# EAGLE board main (EAGLE 9.6.2)

Size 62.23 x 66.67 mm. Coordinates in mm from the lower left corner, seen from the top.
Outline: 0,66.67 62.23,66.67 62.23,0 0,0 0,66.67
Copper layers (1*16): Top 0.035559375mm / dielectric 1.6mm / Bottom 0.035559375mm
Design rules "default *": minimum track width 6mil, minimum drill 10mil, track to track 6mil, track to pad 6mil, pad to pad 6mil, via to via 6mil, smd to smd 6mil, copper to edge 15mil, drill to drill 6mil, minimum pad ring 5mil, minimum via ring 5mil, stop-mask expansion 2.5mil, vias tented up to drill 0mil, thermal gap 10mil

## Footprints (pad centres in the part's own frame; a part is rotated, then mirrored left to right if it is on the bottom)
SMD1,27-2,54 = smd 1.27 x 2.54: 1 0,0
1X02 = drill 1.016 long: 1 -1.27,0; 2 1.27,0
C0805 = smd 1.3 x 1.5: 1 -0.95,0; 2 0.95,0
153CLV-0605 = smd 3.5 x 1.6: + 2.7,0; - -2.7,0
C1210 = smd 1.6 x 2.7: 1 -1.4,0; 2 1.4,0
SOD323-W = smd 1.5 x 1.2: A 1.45,0; C -1.45,0
LED5MM = drill 0.813 octagon: A -1.27,0; K 1.27,0
1X03 = drill 1.016 long: 1 -2.54,0; 2 0,0; 3 2.54,0
INFINEON_IRF8910PBF_0 = smd 1.78 x 0.72: 1 -2.34,1.905; 2 -2.34,0.635; 3 -2.34,-0.635; 4 -2.34,-1.905; 5 2.34,-1.905; 6 2.34,-0.635; 7 2.34,0.635; 8 2.34,1.905
R0805 = smd 1.3 x 1.5: 1 -0.95,0; 2 0.95,0
SOIC127P600X175-14N = smd 1.95 x 0.59: 1 -2.48,3.81; 2 -2.48,2.54; 3 -2.48,1.27; 4 -2.48,0; 5 -2.48,-1.27; 6 -2.48,-2.54; 7 -2.48,-3.81; 8 2.48,-3.81; 9 2.48,-2.54; 10 2.48,-1.27; 11 2.48,0; 12 2.48,1.27; 13 2.48,2.54; 14 2.48,3.81
SOT95P285X140-5N = smd 1.35 x 0.6: 1 -1.185,0.95; 2 -1.185,0; 3 -1.185,-0.95; 4 1.185,-0.95; 5 1.185,0.95
SO-8 = smd 1.524 x 0.61: 1 -2.743,1.905; 2 -2.743,0.635; 3 -2.743,-0.635; 4 -2.743,-1.905; 5 2.743,-1.905; 6 2.743,-0.635; 7 2.743,0.635; 8 2.743,1.905
SOT143 = smd 1.2 x 1.44: 1 -0.75,-1.1 | smd 1 x 1.44: 2 0.95,-1.1; 3 0.95,1.1; 4 -0.95,1.1

## Placement (x,y rotation side)
3V3_PAD  [SMD1,27-2,54]  -14.6,-59.69 0 top  (outside the outline)
BAT  [1X02]  -10.16,-44.45 0 top  (outside the outline)
BAT_EN_PAD  [SMD1,27-2,54]  -29.84,-59.69 0 top  (outside the outline)
BEOFRE_V  [SMD1,27-2,54]  -18.41,-59.69 0 top  (outside the outline)
C1  1nf  [C0805]  48.89,40.64 0 top
C2  1nf  [C0805]  49.53,33.02 0 top
C3  1nf  [C0805]  10.8,-1.91 0 top
C4  100uf  [153CLV-0605]  3.81,-10.8 0 top  (outside the outline)
C5  1uf  [C1210]  33.66,53.98 0 top
C6  1uf  [C1210]  57.78,63.5 0 top
C7  1uf  [C1210]  57.78,57.78 0 top
D1  [SOD323-W]  10.8,14.6 0 top
D2  [SOD323-W]  10.8,10.16 0 top
LED1  [LED5MM]  12.07,-6.35 0 top  (outside the outline)
LED2  [LED5MM]  12.07,-13.34 0 top  (outside the outline)
OUT  [1X02]  -10.16,-50.16 0 top  (outside the outline)
PROGRAM  [1X03]  -8.89,-55.88 0 top  (outside the outline)
Q1  j  [INFINEON_IRF8910PBF_0]  36.83,40.64 0 top
R1  200k  [R0805]  57.15,52.7 0 top
R2  100k  [R0805]  57.15,48.26 0 top
R3  200k  [R0805]  57.15,43.81 0 top
R4  100k  [R0805]  57.15,39.37 0 top
R5  65  [R0805]  1.91,-20.32 0 top  (outside the outline)
R6  65  [R0805]  1.91,-24.77 0 top  (outside the outline)
R7  100k  [R0805]  -7.62,-29.21 0 top  (outside the outline)
R8  1k  [R0805]  -7.62,-33.66 0 top  (outside the outline)
SERIAL  [1X02]  -36.83,-67.31 0 top  (outside the outline)
U1  ATTINY1614-SSNR  [SOIC127P600X175-14N]  48.26,23.49 0 top
U2  RS3236-3.3  [SOT95P285X140-5N]  26.67,43.81 0 top
U$1  IRF7314PBF  [SO-8]  12.07,30.48 0 top
U$2  MIC5018  [SOT143]  11.43,21.59 0 top
U$3  MIC5018  [SOT143]  11.43,5.08 0 top
UPDI_PAD  [SMD1,27-2,54]  -22.23,-59.69 0 top  (outside the outline)
V_OUT_PAD  [SMD1,27-2,54]  -41.28,-66.04 0 top  (outside the outline)
VB_SENSE_PAD  [SMD1,27-2,54]  -37.47,-59.69 0 top  (outside the outline)
WALL  [1X02]  -10.16,-38.73 0 top  (outside the outline)
WALL_EN_PAD  [SMD1,27-2,54]  -26.03,-59.69 0 top  (outside the outline)
WALL_SENSE_PAD  [SMD1,27-2,54]  -33.66,-59.69 0 top  (outside the outline)

## Library data of the parts
3V3_PAD BAT_EN_PAD BEOFRE_V UPDI_PAD V_OUT_PAD VB_SENSE_PAD WALL_EN_PAD WALL_SENSE_PAD = wirepad
BAT OUT PROGRAM SERIAL WALL = pinhead
C1-C7 = rcl; SPICEPREFIX: C
D1 D2 = diode
LED1 LED2 = led
Q1 = Infineon - IRF8910PBF; AUTOMOTIVE: No; CENTROID_NOT_SPECIFIED: No; CONTINUOUS_DRAIN_CURRENT: 10A; DATASHEET: https://www.infineon.com/dgdl/irf8910pbf.pdf?fileId=5546d462533600a401535610ec101d8d; DEPLETION_MODE: False; DEVICE_CLASS_L1: Discrete Semiconductors; DEVICE_CLASS_L2: Transistors; DEVICE_CLASS_L3: MOSFETs; DIGIKEY_DESCRIPTION: MOSFET 2N-CH 20V 10A 8-SOIC; DIGIKEY_PART_NUMBER: IRF8910PBF-ND; DRAIN_TO_SOURCE_BREAKDOWN_VOLTAGE: 20V; DRAIN_TO_SOURCE_RESISTANCE: 14.6mΩ; DRAIN_TO_SOURCE_VOLTAGE: 20V; FOOTPRINT_PARAMETERS_1: {"fp_type":"SOIC_narrow","params":{"N":{"nom":"8","long name":"Number of leads","min":null,"max":null,"short name":"N","type":"count"},"A":{"nom":false,"long name":"Height","min":1350000,"max":1750000,"short name":"A","type":"measurement"},"A1":{"nom":false,"long name":"Package clearance","min":100000,"max":250000,"short name":"A1","type":"measurement"},"A2":{"nom":false,"long name":"Package height","min":false,"max":1500000,"short name":"A2","type":"measurement"},"D":{"nom":false,"long name":"Package length","min":4800000,"max":5000000,"short name":"D","type":"measurement"},"E":{"nom":false,"long name":"Width w/ leads","min":5800000,"max":6200000,"short name":"E","type":"measurement"},"E1":{"nom":false,"long name":"Package width","min":3800000,"max":4000000,"short name":"E1","type":"measurement"},"B":{"nom":false,"long name":"Lead width","min":330000,"max":510000,"short name":"B","type":"measurement"},"C":{"nom":false,"long name":"Lead thickness","min":190000,"max":250000,"short name":"C","type":"measurement"},"e":{"nom":1270000,"long name":"Lead pitch","min":null,"max":null,"short name":"e","type":"measurement"},"L":{"nom":false,"long name":"Lead foot length","min":400000,"max":1270000,"short name":"L","type":"measurement"},"PHI":{"nom":false,"long name":"Lead foot angle","min":0,"max":8000000,"short name":"PHI","type":"measurement"},"HT":{"default":"No","long name":"Thermal pad","type":"multichoiceparent","short name":"HT","children":[]},"offset x":{"nom":0,"long name":"X Center offset","min":null,"max":null,"short name":"offset x","type":"measurement"},"offset y":{"nom":0,"long name":"Y Center offset","min":null,"max":null,"short name":"offset y","type":"measurement"},"LS":{"default":"Rounded rectangle","long name":"Land shape","type":"multichoice","short name":"LS"},"LS1":{"default":"Rectangle","long name":"Land shape (Pin 1)","type":"multichoice","short name":"LS1"},"solder toe":{"nom":550000,"long name":"Solder fillet (toe)","min":null,"max":null,"short name":"solder toe","type":"fixedmeasurement"},"solder heel":{"nom":450000,"long name":"Solder fillet (heel)","min":null,"max":null,"short name":"solder heel","type":"fixedmeasurement"},"solder side":{"nom":50000,"long name":"Solder fillet (side)","min":null,"max":null,"short name":"solder side","type":"fixedmeasurement"},"courtyard":{"nom":500000,"long name":"Courtyard","min":null,"max":null,"short name":"courtyard","type":"fixedmeasurement"},"SF":{"default":"A","long name":"Packing level","type":"multichoiceparent","short name":"SF","help":"http://support.upverter.com/customer/portal/articles/978783-what-is-a-footprint-packing-level","children":["solder toe","solder heel","solder side","courtyard"]}}}; FOOTPRINT_PARAMETERS_2: {"fp_type":"SOIC_narrow","params":{"N":{"nom":"8","long name":"Number of leads","min":null,"max":null,"short name":"N","type":"count"},"A":{"nom":false,"long name":"Height","min":1350000,"max":1750000,"short name":"A","type":"measurement"},"A1":{"nom":false,"long name":"Package clearance","min":100000,"max":250000,"short name":"A1","type":"measurement"},"A2":{"nom":false,"long name":"Package height","min":false,"max":1500000,"short name":"A2","type":"measurement"},"D":{"nom":false,"long name":"Package length","min":4800000,"max":5000000,"short name":"D","type":"measurement"},"E":{"nom":false,"long name":"Width w/ leads","min":5800000,"max":6200000,"short name":"E","type":"measurement"},"E1":{"nom":false,"long name":"Package width","min":3800000,"max":4000000,"short name":"E1","type":"measurement"},"B":{"nom":false,"long name":"Lead width","min":330000,"max":510000,"short name":"B","type":"measurement"},"C":{"nom":false,"long name":"Lead thickness","min":190000,"max":250000,"short name":"C","type":"measurement"},"e":{"nom":1270000,"long name":"Lead pitch","min":null,"max":null,"short name":"e","type":"measurement"},"L":{"nom":false,"long name":"Lead foot length","min":400000,"max":1270000,"short name":"L","type":"measurement"},"PHI":{"nom":false,"long name":"Lead foot angle","min":0,"max":8000000,"short name":"PHI","type":"measurement"},"HT":{"default":"No","long name":"Thermal pad","type":"multichoiceparent","short name":"HT","children":[]},"offset x":{"nom":0,"long name":"X Center offset","min":null,"max":null,"short name":"offset x","type":"measurement"},"offset y":{"nom":0,"long name":"Y Center offset","min":null,"max":null,"short name":"offset y","type":"measurement"},"LS":{"default":"Rounded rectangle","long name":"Land shape","type":"multichoice","short name":"LS"},"LS1":{"default":"Rectangle","long name":"Land shape (Pin 1)","type":"multichoice","short name":"LS1"},"solder toe":{"nom":350000,"long name":"Solder fillet (toe)","min":null,"max":null,"short name":"solder toe","type":"fixedmeasurement"},"solder heel":{"nom":350000,"long name":"Solder fillet (heel)","min":null,"max":null,"short name":"solder heel","type":"fixedmeasurement"},"solder side":{"nom":30000,"long name":"Solder fillet (side)","min":null,"max":null,"short name":"solder side","type":"fixedmeasurement"},"courtyard":{"nom":250000,"long name":"Courtyard","min":null,"max":null,"short name":"courtyard","type":"fixedmeasurement"},"SF":{"default":"B","long name":"Packing level","type":"multichoiceparent","short name":"SF","help":"http://support.upverter.com/customer/portal/articles/978783-what-is-a-footprint-packing-level","children":["solder toe","solder heel","solder side","courtyard"]}}}; FOOTPRINT_PARAMETERS_3: {"fp_type":"SOIC_narrow","params":{"N":{"nom":"8","long name":"Number of leads","min":null,"max":null,"short name":"N","type":"count"},"A":{"nom":false,"long name":"Height","min":1350000,"max":1750000,"short name":"A","type":"measurement"},"A1":{"nom":false,"long name":"Package clearance","min":100000,"max":250000,"short name":"A1","type":"measurement"},"A2":{"nom":false,"long name":"Package height","min":false,"max":1500000,"short name":"A2","type":"measurement"},"D":{"nom":false,"long name":"Package length","min":4800000,"max":5000000,"short name":"D","type":"measurement"},"E":{"nom":false,"long name":"Width w/ leads","min":5800000,"max":6200000,"short name":"E","type":"measurement"},"E1":{"nom":false,"long name":"Package width","min":3800000,"max":4000000,"short name":"E1","type":"measurement"},"B":{"nom":false,"long name":"Lead width","min":330000,"max":510000,"short name":"B","type":"measurement"},"C":{"nom":false,"long name":"Lead thickness","min":190000,"max":250000,"short name":"C","type":"measurement"},"e":{"nom":1270000,"long name":"Lead pitch","min":null,"max":null,"short name":"e","type":"measurement"},"L":{"nom":false,"long name":"Lead foot length","min":400000,"max":1270000,"short name":"L","type":"measurement"},"PHI":{"nom":false,"long name":"Lead foot angle","min":0,"max":8000000,"short name":"PHI","type":"measurement"},"HT":{"default":"No","long name":"Thermal pad","type":"multichoiceparent","short name":"HT","children":[]},"offset x":{"nom":0,"long name":"X Center offset","min":null,"max":null,"short name":"offset x","type":"measurement"},"offset y":{"nom":0,"long name":"Y Center offset","min":null,"max":null,"short name":"offset y","type":"measurement"},"LS":{"default":"Rounded rectangle","long name":"Land shape","type":"multichoice","short name":"LS"},"LS1":{"default":"Rectangle","long name":"Land shape (Pin 1)","type":"multichoice","short name":"LS1"},"solder toe":{"nom":150000,"long name":"Solder fillet (toe)","min":null,"max":null,"short name":"solder toe","type":"fixedmeasurement"},"solder heel":{"nom":250000,"long name":"Solder fillet (heel)","min":null,"max":null,"short name":"solder heel","type":"fixedmeasurement"},"solder side":{"nom":10000,"long name":"Solder fillet (side)","min":null,"max":null,"short name":"solder side","type":"fixedmeasurement"},"courtyard":{"nom":100000,"long name":"Courtyard","min":null,"max":null,"short name":"courtyard","type":"fixedmeasurement"},"SF":{"default":"C","long name":"Packing level","type":"multichoiceparent","short name":"SF","help":"http://support.upverter.com/customer/portal/articles/978783-what-is-a-footprint-packing-level","children":["solder toe","solder heel","solder side","courtyard"]}}}; FOOTPRINT_URL: https://www.infineon.com/cms/en/product/packages/PG-DSO/PG-DSO-8-902/; FOOTPRINT_VARIANT_NAME_0: Recommended_Land_Pattern; FOOTPRINT_VARIANT_NAME_1: IPC_A; FOOTPRINT_VARIANT_NAME_2: IPC_B; FOOTPRINT_VARIANT_NAME_3: IPC_C; GATE_CHARGE_AT_VGS: 7.4nC @ 4.5V; GATE_TO_SOURCE_VOLTAGE: 20V; HEIGHT: 1.75mm; INPUT_CAPACITACE_AT_VDS: 960pF @ 10V; LEAD_FREE: Yes; MAX_FORWARD_DIODE_VOLTAGE: 1V; MAX_JUNCTION_TEMP: +150°C; MF: Infineon; MFG_PACKAGE_IDENT: PG-DSO-8; MFG_PACKAGE_IDENT_COMPONENT_ID: 8fad051ce0ac8b36; MFG_PACKAGE_IDENT_DATE: 11/2006; MFG_PACKAGE_IDENT_REV: 902; MOUSER_PART_NUMBER: 942-IRF8910TRPBF; MPN: IRF8910PBF; NUMBER_OF_CHANNELS: 2; NUMBER_OF_N_CHANNELS: 2; PACKAGE: SOIC8; POWER_DISSIPATION: 2W; PREFIX: Q; PULSE_DRAIN_CURRENT: 82A; REVERSE_RECOVERY_CHARGE: 6.5nC; REVERSE_RECOVERY_TIME: 17ns; ROHS: Yes; RTHJA_MAX: 62.5°C/W; STANDOFF_HEIGHT: 0.1mm; TEMPERATURE_RANGE_HIGH: +150°C; TEMPERATURE_RANGE_LOW: -55°C; THRESHOLD_VGS_MAX: 2.55V; THRESHOLD_VGS_MIN: 1.65V; TURN_OFF_DELAY_TIME: 9.7ns; TURN_ON_DELAY_TIME: 6.2ns; VERIFICATION_VERSION: 0.0.0.3
R1-R8 = rcl; SPICEPREFIX: R
U1 = CustomParts; AVAILABILITY: In Stock; DESCRIPTION: AVR tinyAVR™ 1, Functional Safety (FuSa) Microcontroller IC 8-Bit 20MHz 16KB (16K x 8) FLASH 14-SOIC; MF: Microchip; MP: ATTINY1614-SSNR; PACKAGE: SO-14 Microchip; PRICE: None; PURCHASE-URL: https://pricing.snapeda.com/search/part/ATTINY1614-SSNR/?ref=eda
U2 = AP2112K-3.3TRG1; AVAILABILITY: In Stock; DESCRIPTION: Linear Voltage Regulator IC Positive Fixed 1 Output 600mA SOT-25; MF: Diodes Inc.; MP: AP2112K-3.3TRG1; PACKAGE: SOT-753 Diodes Inc.; PRICE: None; PURCHASE-URL: https://pricing.snapeda.com/search/part/AP2112K-3.3TRG1/?ref=eda
U$1 = IRF7314PBF; AVAILABILITY: In Stock; DESCRIPTION: Mosfet Array 2 P-Channel (Dual) 20V 5.3A 2W Surface Mount 8-SO; MF: Infineon; MP: IRF7314PBF; PACKAGE: SOIC-8 International Rectifier; PRICE: None; PURCHASE-URL: https://pricing.snapeda.com/search/part/IRF7314PBF/?ref=eda
U$2 U$3 = CustomParts

## Nets
+3.3V: 3V3_PAD.1 C3.2 C7.1 PROGRAM.1 U1.1 U2.5
+7V: C1.1 C2.1 D1.A Q1.3 R1.1 U$2.2 U$3.2 WALL.1
+UB: BAT.1 D2.A R3.1 R7.1 U$1.5 U$1.6
BAT_EN: BAT_EN_PAD.1 R8.2 U1.11
GND: BAT.2 C1.2 C2.2 C3.1 C4.- C5.2 C6.2 C7.2 OUT.2 PROGRAM.3 R2.1 R4.1 R5.1 R6.1 U1.14 U2.2 U$2.1 U$3.1 WALL.2
N$1: BEOFRE_V.1 C6.1 D1.C D2.C U2.1 U2.3
N$2: LED1.K R5.2
N$3: Q1.4 U$3.3
N$4: Q1.2 U$2.3
N$5: Q1.5 Q1.7
N$6: Q1.6 Q1.8
N$7: LED2.K R6.2
N$8: U$1.1 U$1.3
N$9: R7.2 R8.1 U$1.2 U$1.4
N$10: LED2.A U1.8
N$11: R1.2 R2.2 U1.2 WALL_SENSE_PAD.1
N$12: R3.2 R4.2 U1.3 VB_SENSE_PAD.1
N$13: LED1.A U1.9
RX: SERIAL.2 U1.6
TX: SERIAL.1 U1.7
UPDI: PROGRAM.2 U1.10 UPDI_PAD.1
VOUT: C4.+ C5.1 OUT.1 Q1.1 U$1.7 U$1.8 V_OUT_PAD.1
WALL_EN: U1.12 U$2.4 U$3.4 WALL_EN_PAD.1

## Tracks (layer width: path | path; a pad name or v marks a point on that pad's centre or on a via)
+3.3V  (5 unrouted)
+7V  (7 unrouted)
+UB  (5 unrouted)
BAT_EN  (2 unrouted)
GND  (18 unrouted)
N$1  (5 unrouted)
N$2  (1 unrouted)
N$3  (1 unrouted)
N$4  (1 unrouted)
N$5  (1 unrouted)
N$6  (1 unrouted)
N$7  (1 unrouted)
N$8  (1 unrouted)
N$9  (3 unrouted)
N$10  (1 unrouted)
N$11  (3 unrouted)
N$12  (3 unrouted)
N$13  (1 unrouted)
RX  (1 unrouted)
TX  (1 unrouted)
UPDI  (2 unrouted)
VOUT  (6 unrouted)
WALL_EN  (3 unrouted)

## Text on the board
bPlace: Lock Power Picker / V1, 2022 / Nam Ngo